# Altium PCB ControllerV1.PcbDoc
Units mm, origin at the board's own origin, x right, y up, seen from the top; angles counter-clockwise.
Board outline 61.02 x 20.07 mm, 2 copper layers (Top Layer, Bottom Layer); 53 components, 39 nets, 203 pads, 113 vias.
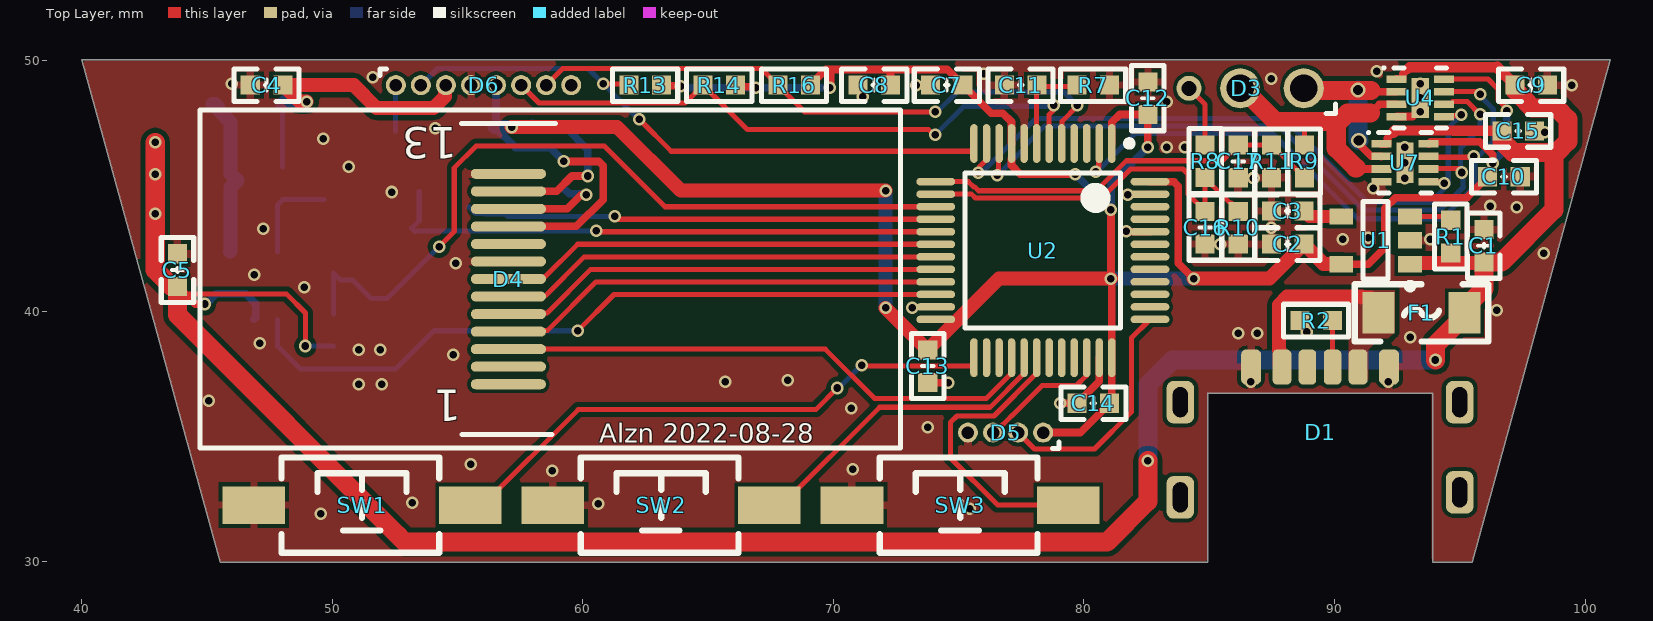
[diagram p0: Top Layer view]
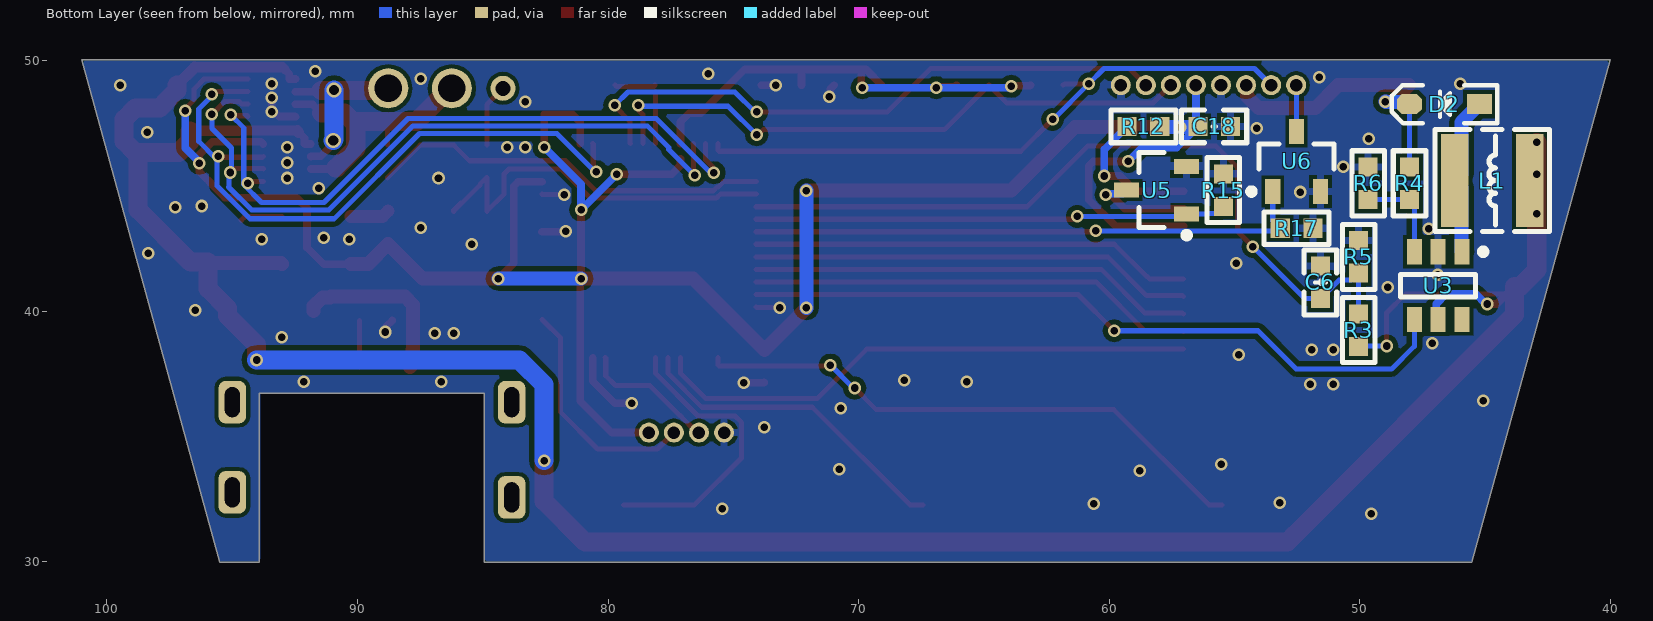
[diagram p1: Bottom Layer view, seen from below]
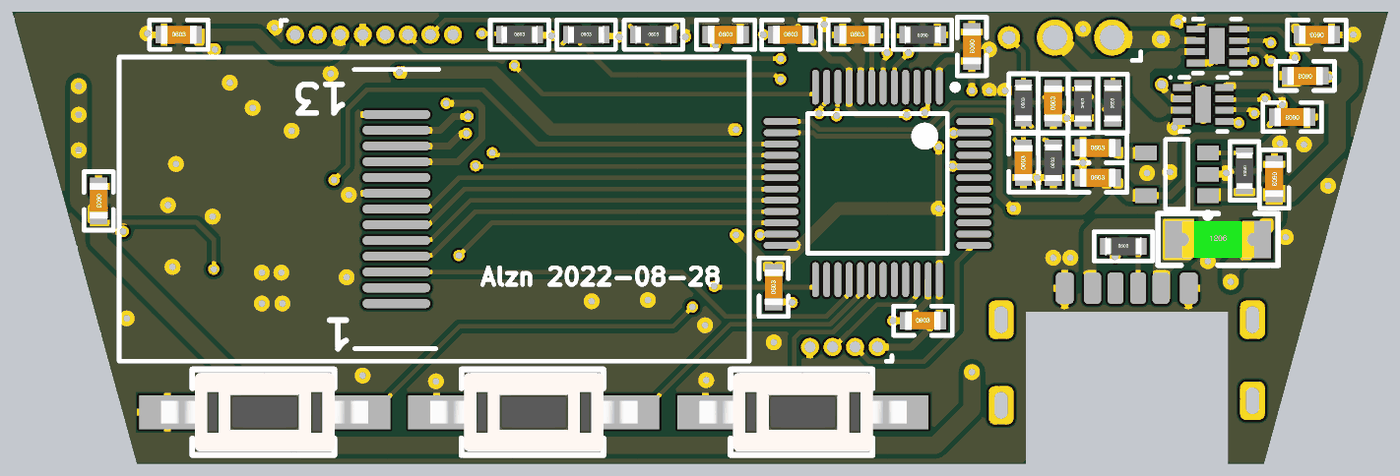
[diagram p2: 3D render of the assembled board from above, using the file's embedded part models]
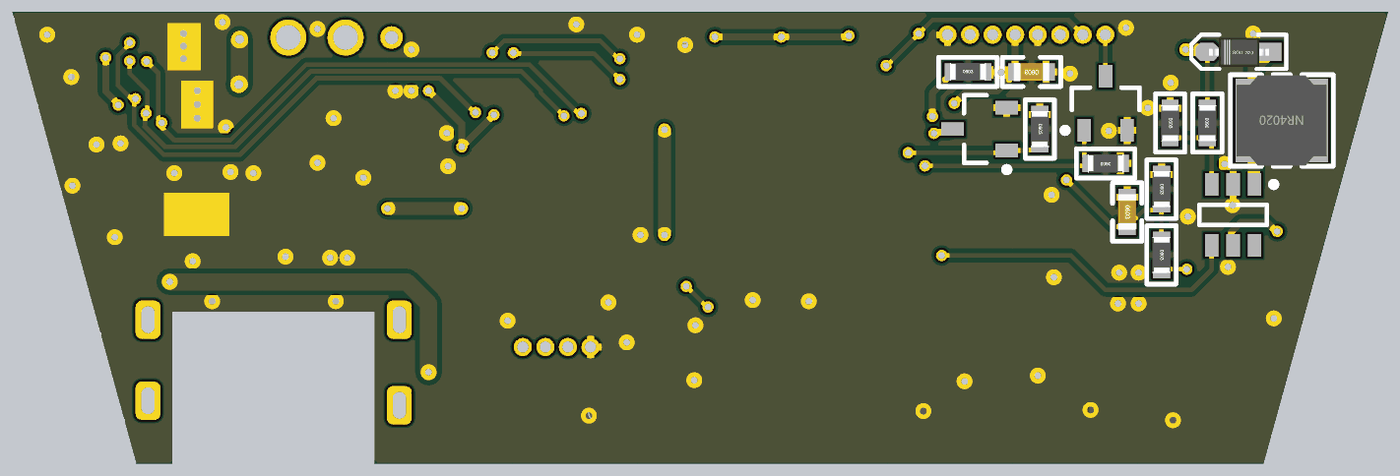
[diagram p3: 3D render of the assembled board from below, using the file's embedded part models]

## Layer stack, top to bottom
Top Solder: solder mask 0.0102, Solder Resist, Dk 3.5
Top Layer: signal copper 0.035
Dielectric 1: dielectric 0.32, FR-4, Dk 4.8
Bottom Layer: signal copper 0.035
Bottom Solder: solder mask 0.0102, Solder Resist, Dk 3.5

## Board outline
45.518,29.972 84.927,29.972 84.938,29.983 84.938,36.728 93.929,36.728 93.929,29.972 95.502,29.972 101.01,50.038 39.99,50.038

## Design rules (kind name [scope] priority, off if disabled: settings)
Clearance [All] p1: gap=0.203 ignorepadtopadclearanceinfootprint=FALSE except(0.091: Arc-Arc Arc-Track Arc-SMDPad Track-Track Track-SMDPad SMDPad-SMDPad; 0.127: THPad-THPad; 0.152: Arc-THPad Track-THPad SMDPad-THPad SMDPad-Via SMDPad-Fill SMDPad-Poly SMDPad-Region SMDPad-Text THPad-Via THPad-Fill THPad-Poly THPad-Region THPad-Text THPad-Hole; 0.178: Arc-Via Arc-Hole Track-Via Track-Hole; 0.254: Via-Via Fill-Hole Poly-Hole Region-Hole Text-Hole; 0.305: Via-Hole)
MinimumSolderMaskSliver [All] p1: minsoldermaskwidth=0
PlaneConnect [All] p1: planeconnectstyle=Relief reliefexpansion=0.508 reliefentries=4 reliefconductorwidth=0.305 reliefairgap=0.152
PolygonConnect PolygonConnect_5V [InNet('NetD1_A9') Or InNet('V5V')] p1: connectstyle=Direct reliefconductorwidth=0.254 reliefentries=4 polygonreliefangle="90 Angle" airgapwidth=0.254
PolygonConnect PolygonConnect_Via [IsVia] p2: connectstyle=Direct reliefconductorwidth=0.254 reliefentries=4 polygonreliefangle="90 Angle" airgapwidth=0.254
PolygonConnect [All] p3: connectstyle=Relief reliefconductorwidth=0.305 reliefentries=4 polygonreliefangle="90 Angle" airgapwidth=0.152
RoomDefinition ControllerV1 [InComponentClass('ControllerV1')] p1: confinementstyle=ConfineOut formatcopy=TRUE lockcomponents=FALSE outline 97.917,29.972 106.934,29.972 106.934,33.782 97.917,33.782
RoutingVias [All] p1: holewidth=0.3 width=0.5 viastyle="Through Hole" minholewidth=0.3 minwidth=0.5 maxholewidth=2 maxwidth=4
SilkToSilkClearance [All] p1: silktosilkclearance=0
SilkToSolderMaskClearance [IsPad] p1: minsilkscreentomaskgap=0 clearancetoexposedcopper=TRUE
SolderMaskExpansion [All] p1: expansion=0.102 istentingtop=FALSE
Width [All] p1: maxlimit=2.54 minlimit=0.152 preferedwidth=0.254
26 further rules are at their usual default settings.

## Components (designator, comment, footprint, x,y, rotation, side; value= is the part's Value field where it differs from the comment)
C1 "1uF" "C 0603_L" 95.961,42.611 r270 top
C2 "1uF" "C 0603_L" 88.128,42.672 r0 top
C3 "22nF" "C 0603_L" 88.128,43.993 r0 top
C4 "1uF" "C 0603_L" 47.371,49.022 r0 top
C5 "1uF" "C 0603_L" 43.815,41.641 r270 top
C6 "1nF" "C 0603_L" 51.562,41.148 r270 bottom
C7 "0.1uF" "C 0603_L" 74.524,49.022 r0 top
C8 "1uF" "C 0603_L" 71.628,49.022 r0 top
C9 "1uF" "C 0603_L" 97.851,49.022 r180 top
C10 "0.1uF" "C 0603_L" 96.764,45.364 r180 top
C11 "0.1uF" "C 0603_L" 77.47,49.022 r0 top
C12 "0.1uF" "C 0603_L" 82.55,48.499 r270 top
C13 "0.1uF" "C 0603_L" 73.762,37.806 r90 top
C14 "0.1uF" "C 0603_L" 80.376,36.322 r0 top
C15 "1uF" "C 0603_L" 97.333,47.193 r180 top
C16 "1nF" "C 0603_L" 84.836,43.332 r90 top
C17 "1nF" "C 0603_L" 86.157,45.974 r90 top
C18 "0.1uF" "C 0603_L" 55.802,47.371 r0 bottom
D1 "USB-C-6Pin" USB-C-6Pin-InBoard 89.421,29.966 r0 top locked
D2 "1N5819" SOD-323 46.612,48.26 r0 bottom
D3 "TE" TE 88.773,48.895 r180 top locked
D4 "ZJY096T" LCD_0p96_ZJY096T 72.673,41.281 r180 top locked
D5 "DEBUG" DBG 78.368,35.154 r180 top
D6 "Fan DS18B20" "Connector Fan DS18B20" 52.531,49.022 r0 top
F1 "MSMD200-8V 2A" "FU 1206" 93.472,39.929 r0 top
L1 "10uH" NR4020 44.704,45.212 r0 bottom
R1 "100k" "R 0603_L" 94.64,42.977 r270 top
R2 "5.1k" "R 0603_L" 89.266,39.624 r0 top
R3 "20k" "R 0603_L" 50.038,39.243 r270 bottom
R4 "82k" "R 0603_L" 48.006,45.1 r90 bottom
R5 "20k" "R 0603_L" 50.038,42.164 r270 bottom
R6 "4.3k" "R 0603_L" 49.657,45.1 r270 bottom
R7 "0R" "R 0603_L" 80.366,49.022 r180 top
R8 "20k" "R 0603_L" 84.836,45.989 r90 top
R9 "20k" "R 0603_L" 88.798,45.974 r90 top
R10 "20k" "R 0603_L" 86.157,43.332 r90 top
R11 "20k" "R 0603_L" 87.478,45.974 r90 top
R12 "15R" "R 0603_L" 58.626,47.371 r180 bottom
R13 "10k" "R 0603_L" 62.484,49.022 r0 top
R14 "4.7k" "R 0603_L" 65.441,49.022 r0 top
R15 "20k" "R 0603_L" 55.436,44.831 r270 bottom
R16 "4.7k" "R 0603_L" 68.428,49.022 r0 top
R17 "20k" "R 0603_L" 52.515,43.307 r0 bottom
SW1 "3x6x5" "TSW SMD-3*6*5" 51.181,32.258 r0 top
SW2 "3x6x5" "TSW SMD-3*6*5" 63.119,32.258 r0 top
SW3 "3x6x5" "TSW SMD-3*6*5" 75.057,32.258 r0 top
U1 "RT9193" "SOT23-5 RT9193" 91.643,42.824 r180 top
U2 "STM32L051C8T6" LQFP48 78.359,42.418 r270 top locked
U3 "SX1308" "SOT23-6 SX1308" 46.863,41.021 r270 bottom
U4 "DRV8837" "WSON-8 DRV8837" 93.421,48.514 r0 top
U5 "BSS138" "SOT23-3 BSS138" 58.103,44.831 r0 bottom
U6 "BSS138" "SOT23-3 BSS138" 52.515,45.974 r90 bottom
U7 "DRV8837" "WSON-8 DRV8837" 92.812,45.923 r0 top

## Footprints (in the part's own frame and the unit in brackets; to place one, negate y for a bottom-side part, rotate by r counter-clockwise, add the part's x,y. Pads: shape width x height; smd on the part's side, far side on the other; paste and mask are expansions set on the pad)
"C 0603_L" [mil] "无极性贴片电容"
  rect 30x30 smd: 1(-25.59,0) 2(25.59,0)
  silkscreen extent -51,-26 51,26, body extent -31,-16 31,16, height 32
"Connector Fan DS18B20" [mm]
  round 0.8 hole 0.5: 1(0,0) 2(1,0) 3(2,0) 4(3,0) 5(4,0) 6(5,0) 7(6,0) 8(7,0)
  silkscreen extent -0.64,0.38 -0.38,0.64
DBG [mm]
  round 0.8 hole 0.5: 1(0,0) 2(1,0) 3(2,0) 4(3,0)
  silkscreen extent -0.64,0.38 -0.38,0.63
"FU 1206" [mil] "贴片保险丝"
  rect 50x65 smd: 1(-67.5,0) 2(67.5,0)
  silkscreen extent -105,-45 105,45, body extent -63,-32 63,32, height 34
LCD_0p96_ZJY096T [mm]
  oval 3x0.4 smd: 1(15.65,4.2) 2(15.65,3.5) 3(15.65,2.8) 4(15.65,2.1) 5(15.65,1.4) 6(15.65,0.7) 7(15.65,0) 8(15.65,-0.7) 9(15.65,-1.4) 10(15.65,-2.1) 11(15.65,-2.8) 12(15.65,-3.5) 13(15.65,-4.2)
  silkscreen extent 0,-6.75 27.95,6.75
LQFP48 [mm] "TSQFP, 48-Leads, Body 7.00x7.00mm, Pitch 0.50mm, IPC Medium Density"
  oval 1.55x0.3 smd: 1(-4.275,2.75) 2(-4.275,2.25) 3(-4.275,1.75) 4(-4.275,1.25) 5(-4.275,0.75) 6(-4.275,0.25) 7(-4.275,-0.25) 8(-4.275,-0.75) 9(-4.275,-1.25) 10(-4.275,-1.75) 11(-4.275,-2.25) 12(-4.275,-2.75) 25(4.275,-2.75) 26(4.275,-2.25) 27(4.275,-1.75) 28(4.275,-1.25) 29(4.275,-0.75) 30(4.275,-0.25) 31(4.275,0.25) 32(4.275,0.75) 33(4.275,1.25) 34(4.275,1.75) 35(4.275,2.25) 36(4.275,2.75)
  oval 0.3x1.55 smd: 13(-2.75,-4.275) 14(-2.25,-4.275) 15(-1.75,-4.275) 16(-1.25,-4.275) 17(-0.75,-4.275) 18(-0.25,-4.275) 19(0.25,-4.275) 20(0.75,-4.275) 21(1.25,-4.275) 22(1.75,-4.275) 23(2.25,-4.275) 24(2.75,-4.275) 37(2.75,4.275) 38(2.25,4.275) 39(1.75,4.275) 40(1.25,4.275) 41(0.75,4.275) 42(0.25,4.275) 43(-0.25,4.275) 44(-0.75,4.275) 45(-1.25,4.275) 46(-1.75,4.275) 47(-2.25,4.275) 48(-2.75,4.275)
  silkscreen extent -4.4,-3.1 3.1,3.58, body extent -3.5,-3.5 3.5,3.5, height 1.6
NR4020 [mm] "4.0mm*4.0mm*2.0mm(长*宽*高）"
  rect 1.1x3.7 smd: 1(-1.5,0) 2(1.5,0)
  silkscreen extent -2.29,-2.03 2.29,2.03, body extent -2,-2 2,2, height 2.1
"R 0603_L" [mil] "1/10W贴片电阻"
  rect 30x30 smd: 1(-25.59,0) 2(25.59,0)
  silkscreen extent -51,-26 51,26, body extent -31,-16 31,16, height 16
SOD-323 [mm] "1.8x1.3X0.9mm（长宽高，不包括引脚）"
  rect 1x0.8 smd: 1(-1.4,0)
  oct 1x0.8 smd: 2(1.4,0)
  silkscreen extent -2.11,-0.76 2.11,0.76, body extent -1.34,-0.63 1.31,0.67, height 1
"SOT23-3 BSS138" [mm] "SOT23, 3-Leads, Body 2.92x2.37mm, Pitch 0.95mm, IPC Medium Density"
  rect 1x0.6 smd: 1(-1.2,0.95) 2(-1.2,-0.95) 3(1.2,0)
  silkscreen extent -1.32,-1.5 0.7,1.92, body extent -0.7,-1.52 0.7,1.52, height 1.11
"SOT23-5 RT9193" [mm] "SOT23, 5-Leads, Body 2.90x2.79mm, Pitch 0.95mm, IPC Medium Density"
  rect 0.95x0.65 smd: 1(-1.375,0.95) 2(-1.375,0) 3(-1.375,-0.95) 4(1.375,-0.95) 5(1.375,0.95)
  silkscreen extent -1.5,-1.55 0.5,1.95, body extent -0.9,-1.55 0.9,1.55, height 1.3
"SOT23-6 SX1308" [mm] "SOT23, 6-Leads, Body 2.90x2.80mm, Pitch 0.95mm, IPC Medium Density"
  rect 1x0.6 smd: 1(-1.35,0.95) 2(-1.35,0) 3(-1.35,-0.95) 4(1.35,-0.95) 5(1.35,0) 6(1.35,0.95)
  silkscreen extent -1.47,-1.5 0.45,1.92, body extent -0.85,-1.5 0.85,1.5, height 1.45
TE [mm]
  round 1.6 hole 1.1: 1(0,0) 2(2.54,0)
  round 1 hole 0.6: 3(4.58,0)
  silkscreen extent -1.27,0.63 -0.89,1.02
"TSW SMD-3*6*5" [mm] "3*6*5mm"
  rect 2.5x1.5 smd: 1(-4.318,0) 2(4.318,0)
  silkscreen extent -3.21,-1.9 3.09,1.9, body extent -4.6,-1.75 4.6,1.75, height 5.1
USB-C-6Pin-InBoard [mm]
  rrect50% 1.1x1.7 hole 0.6 slot 1.2 at 90 deg: 1(-5.575,2.6) 1(-5.575,6.4) 1(5.575,2.8) 1(5.575,6.4)
  rrect50% 0.7x1.4 smd: A5(-0.5,7.8) B5(0.5,7.8)
  rrect50% 0.76x1.4 smd: A9(1.52,7.8) B9(-1.52,7.8)
  rrect50% 0.8x1.4 smd: A12(2.75,7.8) B12(-2.75,7.8)
"WSON-8 DRV8837" [mm] "SON, 8-Leads, Body 2.00x2.00mm, Pitch 0.50mm, Thermal Pad 1.60x0.69mm, IPC Medium Density"
  rect 0.8x0.3 smd: 1(-0.945,0.75) 2(-0.945,0.25) 3(-0.945,-0.25) 4(-0.945,-0.75) 5(0.945,-0.75) 6(0.945,-0.25) 7(0.945,0.25) 8(0.945,0.75)
  rect 0.69x1.6 smd: 9(0,0)
  silkscreen extent -1.5,-1.2 1.05,1.25, body extent -1.05,-1.05 1.05,1.05, height 0.8

## Part data
C1 C2 C3 C4 C5 C6 C7 C8 C9 C10 C11 C12 C13 C14 C15 C16 C17 C18: library part C, "无极性贴片电容", BOM名称=无极性贴片电容, 学习资源=www.ooocke.com, 版权归属=源创客
D2: "肖特基二极管", BOM名称=肖特基二极管, 学习资源=www.ooocke.com, 属性=40V/2A, 版权归属=源创客
D4: library part LCD_0p96_ZJY096T
D5: library part DBG
D6: library part "Connecter Fan DS18B20"
F1: library part FU, "贴片保险丝", BOM名称=贴片保险丝, 学习资源=www.ooocke.com, 版权归属=源创客
L1: library part L-NR, "NR磁胶电感", BOM名称=NR磁胶电感, 学习资源=www.ooocke.com, 版权归属=源创客
R1 R2 R3 R4 R5 R6 R7 R8 R9 R10 R11 R12 R13 R14 R15 R16 R17: library part R, "贴片电阻", BOM名称=贴片电阻, 学习资源=www.ooocke.com, 版权归属=源创客
SW1 SW2 SW3: library part "TSW 3x6", "3x6轻触开关", BOM名称=3x6轻触开关, 学习资源=www.ooocke.com, 版权归属=源创客

## Via types
v1: diameter 0.5, hole 0.3, Top Layer to Bottom Layer, 111 vias
v2: diameter 0.6, hole 0.4, Top Layer to Bottom Layer, 2 vias

## Nets (pads, with @x,y where several pads share a name; then routed paths per layer and width w, separated by ;. In a path a pad name is that pad's centre, name@x,y a point inside that pad or via, vN(x,y) a via of type N, cw(c..) or ccw(c..) an arc to the next point about the centre after c; other vN are vias at no path point)
FAN_EN: U2.22 U3.4 | length 29
  Top Layer w0.203: v1(59.792,39.218) 61.242,40.668 U2.22
  Bottom Layer w0.203: U3.4 47.813,38.598 48.717,37.694 52.527,37.694 54.051,39.218 v1(59.792,39.218)
FAN_PWM: R17.2 U2.17 U6.1 | length 22.6
  Top Layer w0.203: v1(60.534,43.199) 60.566,43.168 U2.17
  Bottom Layer w0.203: U6.1 53.465,43.607 R17.2 53.292,43.18 53.311,43.199 v1(60.534,43.199)
FAN_SEN: D6.2 R13.1 U2.12 | length 25.1
  Top Layer w0.203: v1(60.808,49.073) 61.783,49.073 R13.1 ; v1(62.255,47.65) 63.525,46.38 75.564,46.38 75.609,46.425 U2.12
  Bottom Layer w0.203: D6.2 54.191,49.682 60.198,49.682 v1(60.808,49.073) 62.23,47.65 v1(62.255,47.65)
GND: C1.1 C2.1 C3.1 C4.1 C5.1 C6.1 C7.1 C8.1 C9.1 C10.1 C11.1 C12.1 C13.1 C14.1 C15.1 C16.1 C17.1 C18.1 D1.A12 D1.B12 D4.8 D4.13 D5.4 D6.4 D6.8 R2.1 R5.1 R6.1 R7.1 R10.1 R11.1 R15.1 R17.1 SW1.1 SW2.1 SW3.1 U1.2 U2.8 U2.23 U2.35 U2.44 U2.47 U3.2 U4.4 U4.9 U5.2 U6.2 U7.4 U7.9 | length 9.7
  Top Layer w0.203: v1(73.152,40.132) 73.17,40.15 74.066,40.15 U2.23 ; v1(81.737,44.653) 81.745,44.661 82.627,44.661 U2.47
  Top Layer w0.305: C8.1 71.133,48.866 71.133,48.602 v1(71.171,48.565) ; v1(73.304,49.022) C7.1 ; C13.1 73.772,37.145 74.564,37.145 v1(74.574,37.135) ; v1(79.045,36.322) C14.1 80.607,37.203 80.607,38.141 U2.35 ; v1(81.686,43.18) 81.696,43.17 82.632,43.17 U2.44 ; R2.1 88.845,39.395 88.845,39.275 88.9,39.22 v1(88.9,39.167) ; U4.4 92.479,47.766 93.129,47.766 93.421,48.059 v1(93.421,48.514)
  other v1: 49.53,31.902 75.438,32.106 60.604,32.309 53.188,32.36 58.776,33.63 70.764,33.68 55.524,33.884 73.762,35.357 70.714,36.119 45.06,36.424 51.054,37.084 51.968,37.084 65.684,37.186 86.665,37.186 92.151,37.186 68.174,37.236 54.813,38.252 51.054,38.456 51.918,38.456 47.092,38.71 93.015,38.964 86.157,39.116 86.919,39.116 96.469,40.03 48.87,40.945 46.888,41.453 54.915,41.91 98.349,42.316 85.446,42.672 90.322,42.875 93.828,42.875 91.338,42.926 47.244,43.282 87.478,43.332 97.282,44.145 96.215,44.196 52.375,44.755 91.542,44.907 86.766,45.314 92.812,45.314 50.648,45.771 92.812,45.923 83.312,46.533 84.023,46.533 92.812,46.533 49.632,46.888 98.4,47.142 54.102,47.295 93.421,47.955 83.312,48.362 99.466,49.022 45.974,49.073 93.421,49.073 87.478,49.276 51.613,49.327 75.997,49.479 91.694,49.581
KEY_ADD: SW2.2 U2.29 | length 13
  Top Layer w0.203: SW2.2 67.937,32.258 71.842,36.163 76.254,36.163 77.609,37.518 U2.29
KEY_MODE: SW1.2 U2.25 | length 22.8
  Top Layer w0.203: SW1.2 55.999,32.258 59.809,36.068 69.291,36.068 v1(70.155,36.932) v1@70.155,36.982 ; v1(71.12,37.846) 71.156,37.81 75.564,37.81 75.609,37.855 U2.25
  Bottom Layer w0.203: v1(70.155,36.932) 70.206,36.932 v1(71.12,37.846)
KEY_SUB: SW3.2 U2.30 | length 11.8
  Top Layer w0.203: U2.30 78.109,37.518 76.405,35.814 74.93,35.814 74.676,35.56 74.676,34.138 76.556,32.258 SW3.2
LCD_CS: D4.7 U2.18 | length 17.6
  Top Layer w0.203: D4.7 58.376,41.281 58.475,41.379 58.499,41.379 59.788,42.668 U2.18
LCD_PWM: R15.2 U2.16 U5.1 | length 18.9
  Top Layer w0.203: v1(61.275,43.78) 61.386,43.668 U2.16
  Bottom Layer w0.203: R15.2 55.715,43.902 56.078,43.902 56.098,43.881 U5.1 57.004,43.78 v1(61.275,43.78)
LCD_RS: D4.5 U2.20 | length 17.8
  Top Layer w0.203: D4.5 57.061,39.919 58.562,39.919 60.312,41.668 U2.20
LCD_RST: D4.6 U2.19 | length 17.7
  Top Layer w0.203: D4.6 57.061,40.619 58.5,40.619 60.05,42.168 U2.19
LCD_SCL: D4.4 U2.21 | length 17.9
  Top Layer w0.203: D4.4 57.061,39.219 58.573,39.219 60.523,41.168 U2.21
LCD_SDA: D4.3 U2.28 | length 21.9
  Top Layer w0.203: D4.3 69.672,38.481 71.643,36.51 76.101,36.51 77.109,37.518 U2.28
NetC3_2: C3.2 U1.4 | length 1.6
  Top Layer w0.508: C3.2 88.996,43.774 U1.4
NetC11_2: C11.2 R7.2 U2.7 | length 3.7
  Top Layer w0.203: C11.2@78.105,48.768 78.109,48.764 U2.7 ; C11.2 78.171,48.971 79.665,48.971 R7.2
NetD1_A9: D1.A9 D1.B9 F1.1 | length 7
  Top Layer w0.559: D1.B9 87.8,37.867 87.8,38.44 87.782,38.458 87.782,40.251 88.11,40.578 91.075,40.578 91.101,40.551 91.402,40.551 91.757,40.195 F1.1@91.757,40.005
NetD1_B5: D1.B5 R2.2 | length 1.9
  Top Layer w0.203: R2.2 89.921,39.619 D1.B5
NetD2_1: D2.1 L1.2 U3.1 | length 6.5
  Bottom Layer w0.559: D2.1 45.312,48.26 45.433,48.139 45.433,48.039 45.933,47.539 45.933,45.483 L1.2 45.934,44.942 45.934,42.392 U3.1
NetD3_3: D3.3 R8.2 | length 2.5
  Top Layer w0.203: D3.3 84.836,48.252 R8.2
NetD4_11: D4.11 U5.3 | length 4.2
  Top Layer w0.305: D4.11 59.372,44.081 59.934,44.643 v1(60.13,44.643)
  Bottom Layer w0.305: U5.3 59.451,44.683 60.036,44.683 60.077,44.643 v1(60.13,44.643)
NetD4_12: D4.12 R12.1 | length 5.8
  Top Layer w0.305: D4.12 58.95,44.781 59.563,45.394 v1(60.198,45.394)
  Bottom Layer w0.305: R12.1 60.198,46.449 v1(60.198,45.394)
NetD6_1: D6.1 U6.3 | length 1.9
  Bottom Layer w0.203: U6.3 52.523,47.182 52.523,49.014 D6.1
NetR1_1: R1.1 U1.3 | length 1.7
  Top Layer w0.203: U1.3 94.493,43.774 R1.1
NetR4_1: R4.1 R6.2 U3.3 | length 3.8
  Bottom Layer w0.203: U3.3 47.813,44.257 R4.1 R6.2
SWCLK: D5.2 U2.37 | length 9.4
  Top Layer w0.203: D5.2 78.022,34.5 80.423,34.5 81.89,35.966 81.89,38.924 U2.37
SWDIO: D5.3 U2.34 | length 5.2
  Top Layer w0.203: D5.3@76.507,35.206 76.507,35.217 77.098,35.808 77.108,35.808 78.334,37.033 79.705,37.033 80.09,37.418 80.09,38.124 U2.34
TE_IN1: U2.10 U4.6 U7.6 | length 29
  Top Layer w0.203: v1(76.546,45.419) 76.59,45.463 76.59,46.674 U2.10 ; U7.6 93.774,45.691 94.959,45.691 95.078,45.572 v1(95.078,45.534) ; U4.6 94.616,48.264 94.715,48.363 95.299,48.363 v1(95.809,47.854)
  Bottom Layer w0.203: v1(76.546,45.419) 77.574,46.447 77.574,46.535 78.435,47.396 87.782,47.396 91.135,44.044 94.234,44.044 95.148,44.958 95.128,44.979 95.128,45.484 v1(95.078,45.534) ; v1@95.148,45.534 95.025,45.657 95.025,46.511 95.809,47.295 v1(95.809,47.854)
TE_IN2: U2.11 U4.5 U7.5 | length 27.2
  Top Layer w0.203: v1(75.774,45.526) 75.83,45.583 75.83,45.763 76.109,46.042 U2.11 ; U7.5 93.763,45.167 94.33,45.167 v1(94.386,45.11) ; U4.5 94.401,47.799 95.02,47.799 v1(95.055,47.834)
  Bottom Layer w0.203: v1(75.774,45.526) 75.905,45.526 78.071,47.693 87.984,47.693 91.338,44.338 93.828,44.338 94.539,45.049 94.539,47.318 v1(95.055,47.834) ; v1(94.386,45.11) 94.534,45.11 v1@94.539,45.105
TE_N: D3.2 R9.2 U4.3 U7.3 | length 11.2
  Top Layer w0.203: R9.2 88.798,47.451 88.909,47.562
  Top Layer w0.305: 91.008,45.847 91.18,45.676 91.864,45.676 U7.3 ; 91.44,47.904 91.797,48.262 92.474,48.262 U4.3
  Top Layer w0.762: D3.2 86.314,48.895 87.647,47.562 88.909,47.562 90.068,47.562 ; 90.881,45.72 90.843,45.72 90.068,46.495 90.068,47.562 ; 91.44,47.904 90.513,47.904 90.192,47.584 90.17,47.562 90.068,47.562
TE_P: D3.1 U4.2 U7.2 | length 7
  Top Layer w0.305: v2(90.967,46.811) 90.967,46.678 91.469,46.176 91.864,46.176 U7.2 ; 91.455,48.803 91.495,48.764 U4.2
  Top Layer w0.762: D3.1 88.865,48.803 91.455,48.803
  Bottom Layer w0.762: v2(90.932,48.819) 90.932,46.846 v2(90.967,46.811)
TE_SLEEP: U2.2 U4.7 U7.7 | length 26.4
  Top Layer w0.203: v1(80.467,45.568) 80.467,45.648 80.59,45.771 80.59,46.674 U2.2 ; U7.7 93.786,46.144 95.524,46.144 v1(95.555,46.175) ; U4.7 95.711,48.764 v1(95.809,48.666)
  Bottom Layer w0.203: v1@80.518,45.568 82.042,47.092 87.528,47.092 90.932,43.688 94.295,43.688 95.608,45.001 95.608,46.122 v1(95.555,46.175) ; v1@95.673,46.115 96.338,46.78 96.338,48.073 95.809,48.602 v1(95.809,48.666)
TE_VSEN1: C16.2 R8.1 R10.2 U2.14 | length 16.1
  Top Layer w0.203: U2.14 75.515,44.668 75.672,44.511 80.706,44.511 81.864,45.669 83.955,45.669 84.15,45.474 84.15,44.668 C16.2 R8.1 85.115,45.06 85.115,45.024 R10.2 ; R10.2@85.877,44.323 R10.2@86.157,44.044
TE_VSEN2: C17.2 R9.1 R11.2 U2.13 | length 16.2
  Top Layer w0.203: U2.13 75.383,45.168 75.588,44.963 75.637,44.963 75.794,44.806 80.493,44.806 81.69,46.003 85.536,46.003 C17.2 R11.2 87.498,46.624 R9.1
TEMP_1: D6.6 R14.1 U2.6 | length 24.8
  Top Layer w0.203: D6.6 58.242,48.311 64.08,48.311 R14.1 66.569,47.244 73.799,47.244 74.002,47.041 v1(74.066,47.041) ; U2.6 78.609,47.845 78.791,48.027 v1(78.791,48.222)
  Bottom Layer w0.203: v1(74.066,47.041) 75.205,48.18 78.749,48.18 v1(78.791,48.222)
TEMP_2: D6.7 R16.1 U2.5 | length 24.5
  Top Layer w0.203: D6.7 59.191,49.682 67.117,49.682 R16.1 68.844,47.955 v1(74.066,47.955) ; U2.5 79.128,46.712 79.128,47.581 79.731,48.184 v1(79.731,48.222)
  Bottom Layer w0.203: v1(74.066,47.955) 74.14,47.955 74.936,48.751 79.201,48.751 v1(79.731,48.222)
V3V3: C2.2 C7.2 C8.2 C10.2 C12.2 C13.2 C14.2 C18.2 D4.10 D5.1 D6.5 R12.2 R13.2 R14.2 R16.2 U1.5 U2.1 U2.9 U2.24 U2.36 U2.48 U4.8 U7.8 | length 120.5
  Top Layer w0.203: U4.8 96.126,49.264 96.52,48.87 96.52,48.435 96.876,48.079 v1(96.876,48.006)
  Top Layer w0.305: D4.10 59.739,43.381 60.808,44.45 60.808,45.795 60.629,45.974 v1(59.233,45.974) ; R13.2 63.159,48.997 63.881,48.997 v1(63.906,48.971) ; R14.2 66.155,48.958 66.866,48.958 v1(66.904,48.92) ; R16.2 69.702,49.647 69.952,49.647 ; v1(69.85,48.92) 69.887,48.958 69.887,49.583 69.952,49.647 ; C8.2 72.278,49.647 ; U2.9@77.107,46.07 77.107,45.814 77.455,45.466 v1(79.654,45.466) ; U2.9 77.107,46.695 77.107,47.557 76.759,47.904 76.291,47.904 C7.2 74.549,49.647 72.278,49.647 ; D5.1 79.858,35.154 C14.2 81.107,36.403 81.107,41.271 v1(81.077,41.3) v1(81.077,44.044) ; U2.1 81.111,46.695 81.111,47.533 81.428,47.849 C12.2 v1(82.55,46.533) ; U2.48 82.636,45.166 83.591,45.166 83.769,44.987 83.769,41.91 v1(84.379,41.3) ; U1.5 91.354,41.874 92.014,42.534 92.014,44.109 92.435,44.53 95.287,44.53 95.779,45.022 95.779,45.03 95.885,45.136 C10.2 96.317,45.568 v1(96.317,45.901) 96.317,46.234 95.795,46.755 95.314,46.755 94.559,46.755 94.557,46.757 93.841,46.757 U7.8 ; 69.952,49.647 72.278,49.647
  Top Layer w0.559: v1(57.15,47.346) 61.366,47.346 63.906,44.806 v1(72.085,44.806) ; v1(72.085,40.132) C13.2 76.606,41.3 v1(81.077,41.3) ; v1(84.379,41.3) 87.406,41.3 C2.2 89.57,41.88 90.263,41.88 U1.5
  Bottom Layer w0.305: C18.2 56.477,47.346 57.29,46.533 58.674,46.533 v1(59.233,45.974) ; D6.5 56.531,47.346 56.544,47.358 57.137,47.358 v1(57.15,47.346) ; v1(63.906,48.971) 63.957,48.92 v1(66.904,48.92) v1(69.85,48.92) ; v1(79.654,45.466) v1(81.077,44.044) 81.077,45.06 v1(82.55,46.533) ; v1(96.317,45.901) 96.317,45.954 96.876,46.512 v1(96.876,48.006)
  Bottom Layer w0.559: C18.2@56.477,47.346 v1(57.15,47.346) 57.951,47.346 R12.2 ; v1(72.085,40.132) v1(72.085,44.806) ; v1(81.077,41.3) v1(84.379,41.3)
V5V: C1.2 C5.2 C9.2 C15.2 F1.2 L1.1 R1.2 R3.2 U1.1 U3.5 U4.1 U7.1 | length 109.9
  Top Layer w0.203: C5.2@44.115,40.691 48.158,40.691 48.92,39.929 v1(48.92,38.608)
  Top Layer w0.305: C5.2@44.115,40.691 44.522,40.284 v1(44.907,40.284) ; U7.1 92.112,46.673 92.114,46.676 92.114,46.902 92.354,47.142 ; U4.1 92.721,49.264 92.724,49.266 92.724,49.466 92.918,49.66
  Top Layer w0.406: 92.405,47.193 92.416,47.204 94.742,47.204 94.744,47.203 95.129,47.203 96.674,47.203 C15.2 ; 92.918,49.66 92.991,49.733 96.49,49.733
  Top Layer w0.457: 92.354,47.142 92.405,47.193 ; 96.49,49.733 C9.2
  Top Layer w0.559: U1.1 93.061,41.918 95.918,41.918 C1.2
  Top Layer w0.762: v1(42.926,46.736) v1(42.926,45.466) v1(42.926,43.891) 42.926,41.641 43.576,40.991 C5.2 43.815,39.853 52.629,31.038 52.883,30.785 80.924,30.785 82.55,32.41 v1(82.55,34.036) ; v1(94.031,38.049) 94.031,38.659 95.186,39.814 F1.2 95.186,40.119 95.961,40.894 C1.2 96.672,41.961 98.755,44.044 98.755,46.33 ; C15.2 96.683,46.776 97.13,46.33 98.754,46.33 98.868,46.33 99.314,46.776 99.314,47.661 98.868,48.108 97.892,48.108 97.684,48.315 97.684,48.341 97.211,48.815 97.201,48.815 C9.2
  Bottom Layer w0.203: v1(48.92,38.608) 50.023,38.608 R3.2
  Bottom Layer w0.305: v1(44.907,40.284) 44.96,40.284 45.366,40.691 46.533,40.691 46.939,40.284 46.939,39.747 U3.5
  Bottom Layer w0.762: v1(82.55,34.036) 82.55,37.063 83.536,38.049 v1(94.031,38.049)
V12V: C4.2 D2.2 D6.3 R4.2 | length 12.2
  Top Layer w0.559: v1(48.971,48.362) 48.681,48.362 C4.2 50.851,49.022 51.765,48.108 54.029,48.108 54.485,48.564 54.485,48.976 D6.3
  Bottom Layer w0.203: R4.2 48.012,45.756 D2.2
  Bottom Layer w0.559: D2.2 48.096,48.344 48.954,48.344 v1(48.971,48.362)
VIN_SEN: C6.2 R3.1 R5.2 U2.15 | length 31.1
  Top Layer w0.203: v1(54.254,42.57) 54.864,43.18 54.864,45.72 55.728,46.584 60.858,46.584 63.274,44.168 U2.15
  Bottom Layer w0.203: R3.1 R5.2 50.317,41.235 50.825,41.235 C6.2 52.182,40.498 v1(54.254,42.57)
pads on no net: D1.1 D1.A5 D4.1 D4.2 D4.9 U2.3 U2.4 U2.26 U2.27 U2.31 U2.32 U2.33 U2.38 U2.39 U2.40 U2.41 U2.42 U2.43 U2.45 U2.46 U3.6

## Polygon pours and split planes (outlines as drawn)
GND on Top Layer "NONET_L02_P-001" (solid, remove dead copper, pour order 5): 100.99,49.987 95.504,30.023 93.98,30.023 93.878,30.124 93.878,36.728 84.938,36.728 84.938,30.124 84.836,30.023 45.517,30.023 40.03,49.987
NetD1_A9 on Top Layer "NONET_L02_P-001" (solid, pour order 0): 91.338,37.287 91.338,38.456 91.796,38.913 92.151,38.913 92.405,39.167 92.405,40.843 91.084,40.843 90.576,40.335 90.576,37.287
GND on Bottom Layer "NONET_L02_P-001" (solid, pour order 6): 100.99,49.987 95.504,30.023 93.98,30.023 93.878,30.124 93.878,36.728 84.938,36.728 84.938,30.124 84.836,30.023 45.517,30.023 40.03,49.987

## Silkscreen, mask and mechanical layers (free items; w line width, h text height)
Top Overlay:
  text "Alzn 2022-08-28" at 60.655,34.747 h0.76
Bottom Solder:
  rectangle: 91.389,40.081 94.285,42.012
  rectangle: 92.1,44.856 93.523,46.99
  rectangle: 92.659,47.447 94.132,49.53
Mechanical 1:
  the board outline again, w0.1

## Text inside footprints (layer, text, board x,y; h text height)
D4: Top Overlay "13" at 54.973,47.331 h1.27 r180; Top Overlay "1" at 55.148,36.856 h1.27 r180